# Altium PCB PCB_国产飞控-led端子-copy-copy_2026-03-31.pcbdoc (part 2 of 3)
Units mil, origin at the board's own origin, x right, y up, seen from the top; angles counter-clockwise.
Board outline 3997.5 x 3500.13 mil, 2 copper layers (Top Layer, Bottom Layer); 108 components, 113 nets, 523 pads, 148 vias.
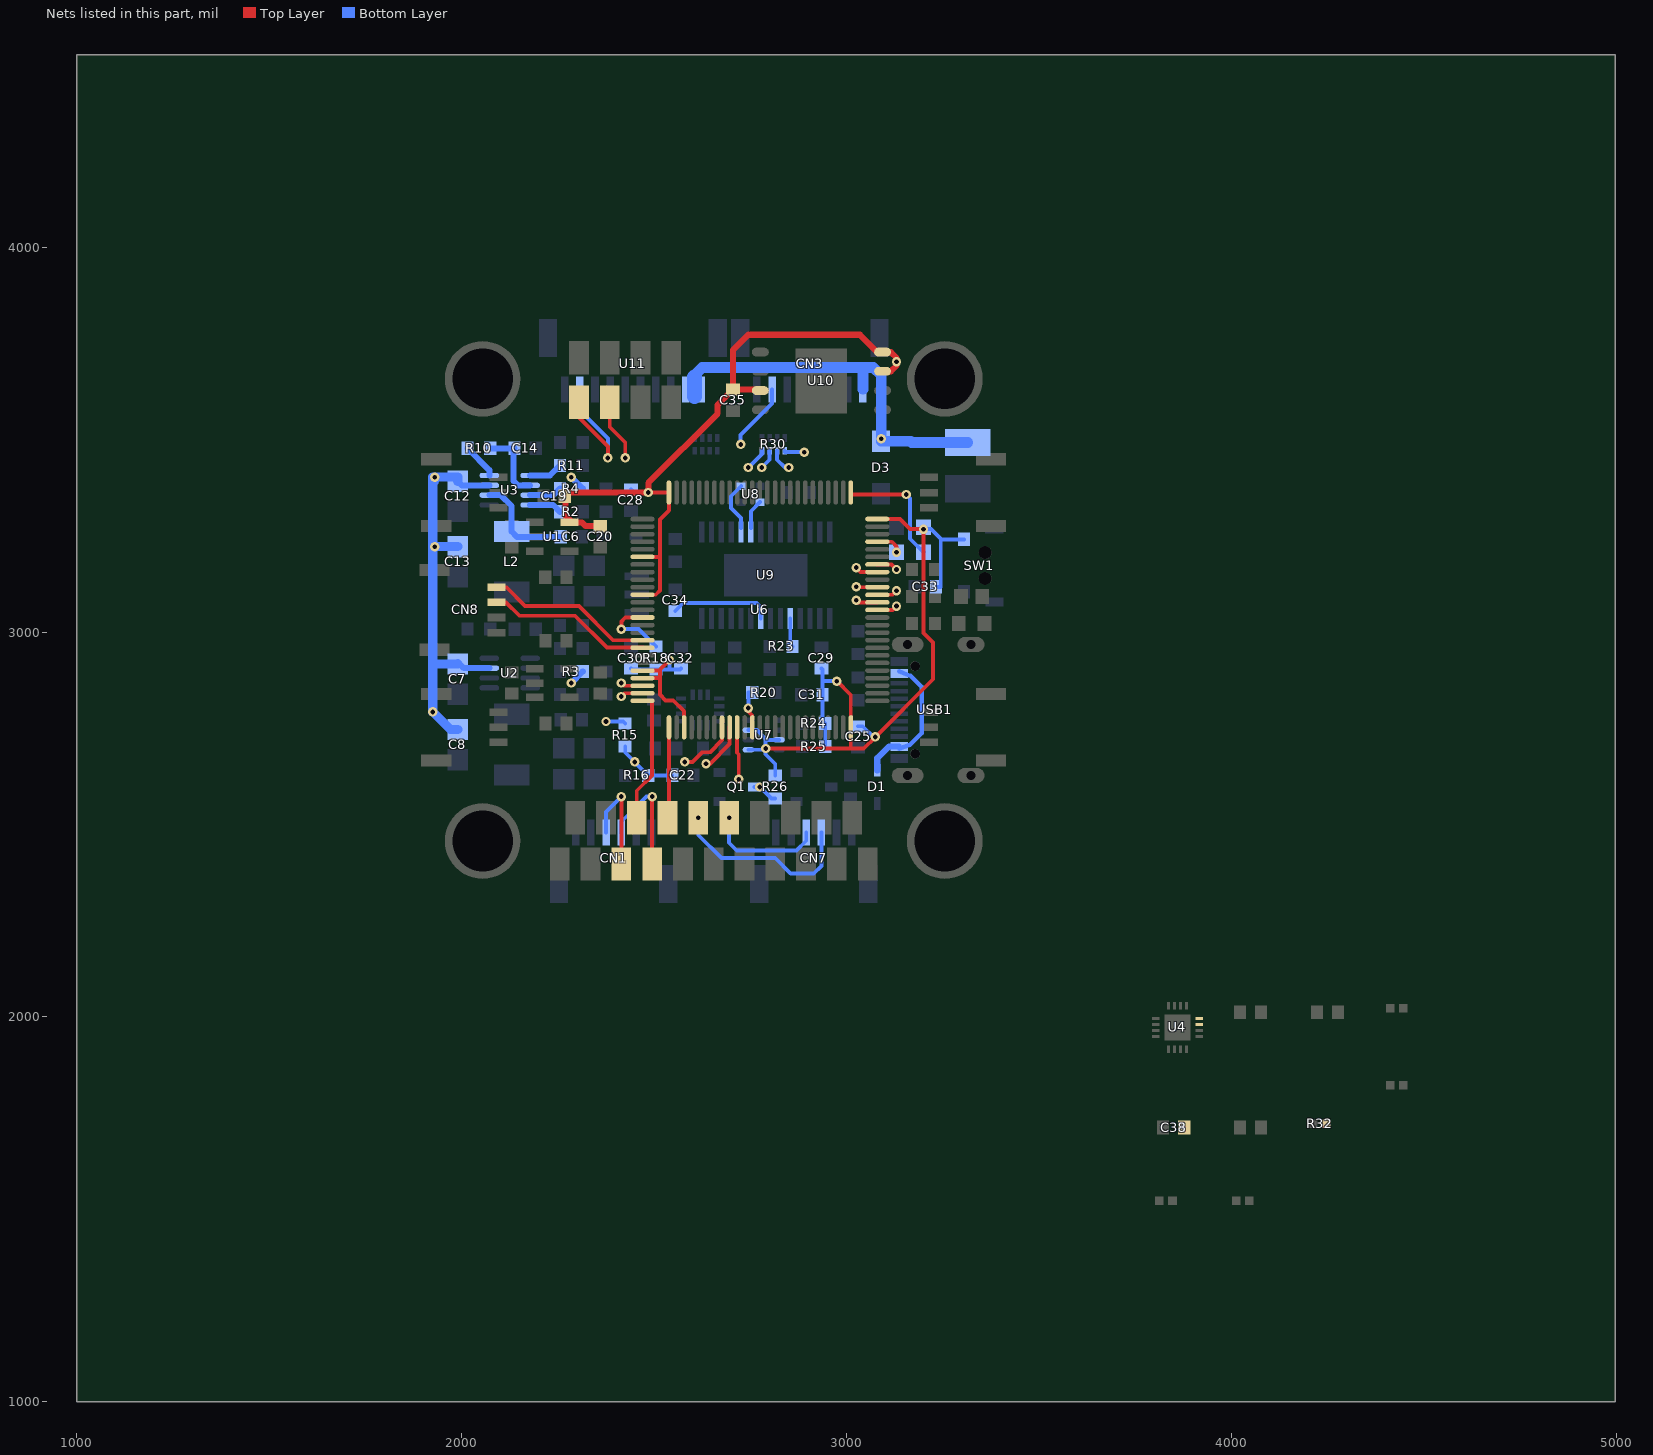
[diagram p2: the nets of this part, all layers, seen from the top]

## Via types
v1: diameter 24.41, hole 12.2, Top Layer to Bottom Layer, tented both sides, 148 vias

## Nets (pads, with @x,y where several pads share a name; then routed paths per layer and width w, separated by ;. In a path a pad name is that pad's centre, name@x,y a point inside that pad or via, vN(x,y) a via of type N, cw(c..) or ccw(c..) an arc to the next point about the centre after c; other vN are vias at no path point) (continued)
SERVO1: R30.4 U6.63 | length 645.2
  Top Layer w10: U6.63@3080.11,3057.63 3120,3057.63 v1(3130,3067.63)
  Mid-Layer 2 w10: v1(2890,3467.63) 2955,3467.63 3090,3332.63 3090,3107.63 v1(3130,3067.63)
  Bottom Layer w10: R30.4@2839.53,3470.8 2839.5,3467.63 v1(2890,3467.63)
SERVO2: R30.3 U6.64 | length 633.9
  Top Layer w10: v1(3025,3082.63) 3030.3,3077.33 U6.64@3080.11,3077.31
  Mid-Layer 2 w10: v1(2850,3427.63) 2960,3427.63 3065,3322.63 3065,3122.63 v1(3025,3082.63)
  Bottom Layer w10: R30.3@2819.84,3470.8 2819.8,3447.83 2840,3427.63 v1(2850,3427.63)
SERVO3: R30.2 U6.65 | length 705.8
  Top Layer w10: U6.65@3080.11,3097 3119.4,3097.03 v1(3130,3107.63)
  Mid-Layer 1 w10: v1(2780,3427.63) 2755,3402.63 2755,3287.63 2900,3142.63 3095,3142.63 v1(3130,3107.63)
  Bottom Layer w10: v1(2780,3427.63) 2800.2,3447.83 R30.2@2800.16,3470.8
SERVO4: R30.1 U6.66 | length 630.9
  Top Layer w10: v1(3025,3117.63) 3025.9,3116.73 U6.66@3080.11,3116.69
  Mid-Layer 1 w10: v1(2745,3427.63) 2730,3412.63 2730,3277.63 2890,3117.63 v1(3025,3117.63)
  Bottom Layer w10: v1(2745,3427.63) 2780.5,3463.13 R30.1@2780.47,3470.8
SWDCLK: pad.5@3200,3207.63 U6.76 | length 317.5
  Top Layer w10: U6.76@3011.22,3362.74 3011.2,3357.63 v1(3155,3357.63)
  Bottom Layer w10: v1(3155,3357.63) 3165,3347.63 3165,3242.63 pad.5@3200,3207.63
SWDIO: pad.5@3130,3207.63 U6.72 | length 70
  Top Layer w10: U6.72@3080.11,3234.8 3117.8,3234.83 3130,3222.63 v1(3130,3207.63)
U3_1: R11.1 U3.1 | length 87.8
  Bottom Layer w15.75: U3.1@2178.1,3407.03 2229.7,3407.03 R11.1@2255.34,3432.63
U3_2: C14.2 R10.1 U3.2 | length 196.4
  Bottom Layer w15.75: R10.1@2074.66,3477.63 C14.2@2137.45,3477.63 2135,3475.23 2135,3392.63 2146.2,3381.43 U3.2@2178.1,3381.43
U3_3: R4.1 U3.3 | length 84.2
  Bottom Layer w15.75: U3.3@2178.1,3355.83 2238.5,3355.83 R4.1@2255.34,3372.63
U3_4: R2.1 U3.4 | length 84.5
  Bottom Layer w15.75: U3.4@2178.1,3330.23 2237.7,3330.23 R2.1@2255.34,3312.63
U3_6: C6.2 L2.1 U3.6 | length 269.1
  Bottom Layer w15.75: U3.6@2072,3355.83 2101.8,3355.83 2130,3327.63 2130,3261.33 2143.7,3247.63 C6.2@2257.45,3247.63
U3_8: R10.2 U3.8 | length 94
  Bottom Layer w15.75: R10.2@2015.35,3477.63 2071.9,3421.03 U3.8@2071.9,3407.03
U4_10: C38.2 U4.10
U4_11: R32.2 U4.11
U6_14: R18.1 U6.14 | length 187.9
  Top Layer w10: v1(2415,3007.63) 2415,3027.63 2425.3,3037.93 U6.14@2469.89,3037.94
  Bottom Layer w10: v1(2415,3007.63) 2459.7,3007.63 R18.1@2505,2962.28
U6_37: R20.2 U6.37 | length 104.7
  Top Layer w10: v1(2745,2802.63) 2745,2793.23 2755.3,2782.93 U6.37@2755.32,2752.52
  Bottom Layer w10: v1(2745,2802.63) 2745,2842.63 R20.2@2755.34,2842.63
U9_5: U8.1 U9.5 | length 131.2
  Bottom Layer w10: U9.5@2726,3269.83 2726,3296.63 2700,3322.63 2700,3352.93 U8.1@2726.38,3379.28
U9_6: U8.3 U9.6 | length 78
  Bottom Layer w10: U9.6@2751.6,3269.83 2751.6,3313.93 U8.3@2775.59,3337.95
U9_19: R23.1 U9.19 | length 75.2
  Bottom Layer w10: U9.19@2853.98,3035.42 2854,2968.33 R23.1@2859.66,2962.63
U9_22: C34.1 U9.22 | length 265.2
  Bottom Layer w10: C34.1@2555,3055.03 2575.9,3075.93 2766.7,3075.93 2777.2,3065.43 U9.22@2777.21,3035.42
UART1_RX: CN7.4 pad.5@2695,2517.63 Q1.3 R26.1 U6.69 | length 1483
  Top Layer w10: U6.69@3080.11,3175.74 3116.9,3175.73 v1(3130,3162.63)
  Mid-Layer 2 w10: v1(2695,2517.63) 2750,2572.63 2990,2572.63 3040,2622.63 3040,2977.63 3080,3017.63 3140,3017.63 3165,3042.63 3165,3127.63 v1(3130,3162.63) ; 2775,2572.63 v1(2775,2597.63)
  Bottom Layer w10: v1(2695,2517.63) 2695,2452.63 2715,2432.63 2870,2432.63 2895.3,2457.93 CN7.4@2895.3,2479.53 ; Q1.3@2760.2,2597.63 v1(2775,2597.63) 2804.7,2567.93 R26.1@2815,2567.93
UART1_TX: CN7.3 pad.5@2615,2517.63 U6.68 | length 1500.3
  Top Layer w10: v1(3025,3167.63) 3036.6,3156.03 U6.68@3080.1,3156.03
  Mid-Layer 2 w10: v1(2615,2517.63) 2620,2517.63 2690,2587.63 2730,2587.63 2775,2632.63 2905,2632.63 3015,2742.63 3015,3052.63 2995,3072.63 2995,3137.63 v1(3025,3167.63)
  Bottom Layer w10: v1(2615,2517.63) 2615,2472.63 2675,2412.63 2815,2412.63 2855,2372.63 2915,2372.63 2934.7,2392.33 CN7.3@2934.7,2479.53
UART2_RX: pad.5@2535,2517.63 U6.26 | length 238.7
  Top Layer w10: pad.5@2535,2517.63 2538.8,2517.63 U6.26@2538.78,2752.52
UART2_TX: pad.5@2455,2517.63 U6.25 | length 345.5
  Top Layer w10: pad.5@2455,2517.63 2455,2587.63 2495,2627.63 2495,2821.43 U6.25@2469.89,2821.41
UART3_RX: CN1.3 pad.5@2495,2397.63 U6.34 | length 611.5
  Top Layer w10: pad.5@2495,2397.63 2495,2457.63 v1(2495,2572.63) ; v1(2635,2657.63) 2645,2657.63 2696.3,2708.93 U6.34@2696.26,2752.52
  Mid-Layer 1 w10: v1(2495,2572.63) 2550,2627.63 2605,2627.63 v1(2635,2657.63)
  Bottom Layer w10: CN1.3@2414.7,2479.53 2414.7,2507.33 2480,2572.63 v1(2495,2572.63)
UART3_TX: CN1.4 pad.5@2415,2397.63 U6.33 | length 640.2
  Top Layer w10: pad.5@2415,2397.63 2415,2462.63 v1(2415,2572.63) ; v1(2580,2662.63) 2600,2662.63 2625,2687.63 2645,2687.63 2676.6,2719.23 U6.33@2676.57,2752.52
  Mid-Layer 1 w10: v1(2415,2572.63) 2505,2662.63 v1(2580,2662.63)
  Bottom Layer w10: CN1.4@2375.3,2479.53 2375.3,2532.93 v1(2415,2572.63)
UART4_RX: CN3.2 pad.5@2305,3597.63 U6.24 U11.2 | length 1626.1
  Top Layer w10: pad.5@2305,3597.63 2305,3557.63 2380,3482.63 v1(2380,3452.63) ; v1(2415,2832.63) 2423.5,2841.13 U6.24@2469.89,2841.09
  Mid-Layer 1 w10: v1(2380,3452.63) 2415,3487.63 v1(2725,3487.63)
  Mid-Layer 2 w10: v1(2380,3452.63) 2365,3437.63 2365,2882.63 v1(2415,2832.63)
  Bottom Layer w10: U11.2@2307.21,3630.7 2307.2,3575.43 2380,3502.63 v1(2380,3452.63) ; v1(2725,3487.63) 2725,3512.63 2806.6,3594.23 CN3.2@2806.57,3630.7
UART4_TX: pad.5@2385,3597.63 U6.23 | length 849.9
  Top Layer w10: pad.5@2385,3597.63 2385,3532.63 2425,3492.63 v1(2425,3452.63) ; v1(2415,2867.63) 2421.9,2860.73 U6.23@2469.9,2860.73
  Mid-Layer 1 w10: v1(2415,2867.63) 2365,2917.63 2365,3392.63 v1(2425,3452.63)
UART8_RX: CN8.2 U6.18 | length 428.1
  Top Layer w10: CN8.2@2090.71,3077.32 2115.3,3077.33 2150,3042.63 2295,3042.63 2378,2959.63 U6.18@2470,2959.63
UART8_TX: CN8.1 U6.17 | length 436.3
  Top Layer w10: CN8.1@2090.71,3116.69 2115.9,3116.73 2165,3067.63 2305,3067.63 2393.7,2978.93 U6.17@2469.89,2978.89
VBAT: C7.2 C8.2 C12.2 C13.2 CN3.8 D3.1 pad.5@3315,3492.63 R3.2 R4.2 R15.2 U2.7 U3.7 U11.9 U11.10 | length 5190.9
  Mid-Layer 1 w10: v1(2285,2867.63) 2375,2777.63 v1(2375,2767.63)
  Mid-Layer 1 w27.56: v1(3090,3502.63) 3035,3557.63 2409,3557.63 2284.8,3432.13 v1(2285,3402.63) ; v1(2285,3402.63) v1(1930,3402.63) 1925,3397.63 v1(1925,2792.63) 2210,2792.63 v1(2285,2867.63) v1(2285,3402.63)
  Bottom Layer w10: v1(2375,2767.63) 2419.7,2767.63 R15.2@2425,2762.28
  Bottom Layer w15.75: C7.2@1990,2922.03 2005.6,2906.43 U2.7@2072,2906.43 ; C12.2@1990,3392 2000.6,3381.43 U3.7@2072,3381.43 ; v1(2285,2867.63) R3.2@2314.66,2897.63 ; v1(2285,3402.63) R4.2@2314.66,3372.63
  Bottom Layer w23.62: v1(1930,3222.03) C13.2@1990,3222 ; v1@1930,3392.03 v1(1930,3402.63) ; 1935,2917.03 C7.2@1990,2917 ; C8.2@1990,2747 1970.6,2747.03 v1(1925,2792.63) 1925,3402.63 1990,3402.63 C12.2@1990,3392
  Bottom Layer w27.56: 2605,3630.73 2605,3667.63 2625,3687.63 3045,3687.63 3070,3687.63 3090,3667.63 D3.1@3090,3495.93 3166.7,3495.93 3170,3492.63 pad.5@3315,3492.63 ; CN3.8@3042.8,3630.7 3042.8,3687.63
  Bottom Layer w39.37: 2605,3612.32 2605,3662.94
VBAT_ADC: C22.2 R15.1 R16.2 U6.35 | length 594.9
  Top Layer w10: U6.35@2715.94,2752.52 2715.9,2686.73 2720,2682.63 v1(2720,2617.63)
  Mid-Layer 2 w10: v1(2450,2662.63) 2485,2627.63 2710,2627.63 v1(2720,2617.63)
  Bottom Layer w10: R15.1@2425,2702.93 2425,2687.33 R16.2@2484.66,2627.63 C22.2@2547.45,2627.63 ; v1(2450,2662.63) 2450,2662.33 v1@2454.7,2657.63
VBUS: D1.1 USB1.A4 USB1.A9 USB1.B4 USB1.B9 | length 366
  Bottom Layer w11.81: USB1.A9@3136.59,2697.24 3165,2707.63 3195,2737.63 3195,2857.63 3166.4,2886.23 USB1.A4@3136.59,2898.02
  Bottom Layer w15.75: D1.1@3080,2640.84 3080,2672.63 3110,2702.63 USB1.A9@3136.6,2702.63
VDD: C19.2 C20.2 C25.2 C28.2 C29.2 C30.2 C31.2 C32.2 C33.2 C35.1 pad.5@3200,3272.63 R18.2 R24.2 R25.2 R26.2 SW1.2 U1.5 U6.6 U6.11 U6.21 U6.22 U6.28 U6.50 U6.75 U6.100 U7.2 U7.6 U7.8 U10.3 U10.7 U10.8 | length 5551.9
  Top Layer w10: U6.22@2469.9,2880.43 2515,2880.43 ; U6.21@2469.9,2900.13 2512.5,2900.13 v1(2540,2927.63) ; U6.11@2469.89,3097 2504.4,3097.03 2515,3107.63 2515,3292.63 2538.8,3316.43 U6.100@2538.78,3362.74 2485.1,3362.73 v1(2485,3362.63) ; 2515,2902.63 2515,2880.43 ; U6.28@2578.1,2752.53 2578.1,2794.53 2550,2822.63 2530,2822.63 2515,2837.63 2515,2880.43 ; v1(2790,2697.63) 3045,2697.63 v1(3075,2727.63) 3225,2877.63 3225,2972.63 3200,2997.63 v1(3200,3267.63) 3165,3267.63 3138.8,3293.83 U6.75@3080.11,3293.85 ; v1(2975,2872.63) 3011.2,2836.43 U6.50@3011.22,2752.52 3011.2,2702.63
  Top Layer w10.08: U6.6@2469.89,3195.43 2515,3195.43
  Top Layer w15.75: C19.2@2267.86,3352.63 2267.9,3362.63 v1(2485,3362.63) 2485,3387.63 2665,3567.63 2665,3590.23 C35.1@2705,3630.18 ; C19.2@2270,3352.63 2270,3302.63 2287.6,3285.03 2296.2,3285.03 2312.6,3285.03 2322.4,3275.23 C20.2@2350,3275.23 ; U10.3@2776.23,3627.63 2773.6,3630.23 C35.1@2705,3630.18 ; U10.7@3093.77,3677.63 3115,3677.63 3130,3692.63 v1(3130,3702.63) 3130,3712.63 3115,3727.63 U10.8@3093.77,3727.63 3080,3727.63 3035,3772.63 2745,3772.63 2705,3732.63 C35.1@2705,3630.18
  Mid-Layer 1 w10: v1(2975,2872.63) 3075,2772.63 v1(3075,2727.63)
  Mid-Layer 1 w15.75: v1(2485,3362.63) 2485,2982.63 v1(2540,2927.63)
  Mid-Layer 2 w10: v1(3130,3702.63) 3130,3522.63 3200,3452.63 v1(3200,3267.63)
  Bottom Layer w10: C30.2@2440,2905.03 2442.1,2902.93 2505,2902.93 2567.9,2902.93 C32.2@2570,2905.03 ; C28.2@2440,3370.18 2447.6,3362.63 v1(2485,3362.63) ; 2540,2902.97 v1(2540,2927.63) ; U7.8@2745.29,2694.24 2786.6,2694.23 v1(2790,2697.63) ; U7.6@2745.29,2745.43 2767.2,2745.43 2790,2722.63 v1(2790,2697.63) ; 2790,2719.83 U7.2@2824.7,2719.84 ; R26.2@2815,2627.28 2815,2657.63 2790,2682.63 v1(2790,2697.63) ; C29.2@2935,2905.03 2937.6,2902.53 C31.2@2937.55,2837.63 2937.6,2769.73 R24.2@2944.66,2762.63 R25.2@2944.66,2702.63 ; 2937.6,2872.73 2937.7,2872.63 v1(2975,2872.63) ; C25.2@3030,2755.18 3042.4,2755.23 3070,2727.63 v1(3075,2727.63) ; pad.5@3200,3272.63 v1(3200,3267.63) ; C33.2@3232.55,3117.63 3245,3117.63 3245,3242.63 3220,3267.63 ; SW1.2@3305.11,3240.81 3246.8,3240.83 3220,3267.63 ; v1(3200,3267.63) 3220,3267.63 ; v1(3200,3267.63) 3220,3267.63
pads on no net: CN3.1 SDO1.2 SDO1.3 SDO1.10 SDO1.11 SW1. SW1.3 SW1.4 U1.4 U4.2 U4.3 U4.4 U4.5 U4.14 U4.15 U4.16 U4.17 U4.21 U6.1 U6.2 U6.3 U6.4 U6.5 U6.7 U6.8 U6.9 U6.19 U6.38 U6.39 U6.40 U6.41 U6.42 U6.43 U6.44 U6.45 U6.46 U6.49 U6.51 U6.52 U6.53 U6.54 U6.55 U6.56 U6.57 U6.58 U6.59 U6.67 U6.73 U6.81 U6.83 U6.88 U6.89 U6.90 U6.91 U6.97 U6.98 U9.1 U9.2 U9.7 U9.12 U9.13 U9.14 U9.15 U9.16 U9.17 U9.18 U9.27 U9.28 U9.29 U12.4 USB1. USB1.A5 USB1.A8 USB1.B5 USB1.B8

## Polygon pours and split planes (outlines as drawn)
GND on Bottom Layer (solid): 1507.5,3985.13 1507.5,2090.13 1532.5,2065.13 3652.5,2065.13 3652.5,3965.13 3632.5,3985.13 3767.5,3985.13 3782.5,4000.13
GND on Mid-Layer 2 (solid): 1525,3972.63 1525,2062.63 1520,2057.63 3650,2057.63 3650,3937.63 3595,3992.63
GND on Mid-Layer 1 (solid): 1500,3995.13 1500,2100.13 1540,2060.13 3585,2060.13 3645,2120.13 3645,3970.13 3650,3975.13
GND on Top Layer (solid): 1530,3960.13 1530,2060.13 1540,2050.13 3610,2050.13 3630,2070.13 3630,3950.13 3625,3955.13

## Keep-outs
Keep-Out Layer:
  lines w10: 1897.13,2457.24 ccw(c2054.61,2457.24) 2054.61,2299.76 ; 1897.13,3658.02 cw(c2054.61,3658.02) 2054.61,3815.5 ; 3255.39,2299.76 ccw(c3255.39,2457.24) 3412.87,2457.24 ; 3255.39,3815.5 cw(c3255.39,3658.02) 3412.87,3658.02

## Other copper
Top Layer:
  region net BOX_MOSI: 2915.85,3499.56 2934.15,3499.56 2930,3491.01 2920,3491.01
  region net BOX_MOSI: 3008.07,3498.48 3008.07,3516.78 3016.62,3512.63 3016.62,3502.63
  region net AT_CS: 2807.18,3306.87 2794.24,3319.81 2803.21,3322.92 2810.29,3315.84
  region net AT_SCK: 2915.76,3319.81 2902.82,3306.87 2899.71,3315.84 2906.79,3322.92
  region net AT_MISO: 2878.16,3319.69 2868.26,3304.29 2863.25,3312.3 2868.79,3320.92
  region net AT_MOSI: 2823.12,3317.71 2840.86,3313.2 2839.1,3322.46 2829.1,3325.01
  region net BOOT0: 3266.93,3153.48 3266.93,3171.78 3258.38,3167.63 3258.38,3157.63
  region net BOOT0: 3265.85,3170.7 3284.15,3170.7 3280.04,3179.25 3269.96,3179.25
  region net MOTOR4: 2595.85,3419.56 2614.15,3419.56 2610,3412.63 2600,3412.63
  region net MOTOR3: 2647.66,3418.13 2629.62,3421.22 2632.2,3412.11 2642.2,3410.4
  region net MOTOR2: 2684.89,3420.48 2666.67,3418.71 2671.6,3410.61 2681.6,3411.57
  region net MOTOR1: 2700.85,3419.56 2719.15,3419.56 2715,3415.13 2705,3415.13
  region net GYRO_MOSI: 2690.85,2859.56 2709.15,2859.56 2705,2851.01 2695,2851.01
  region net GYRO_SCK: 2625.26,2866.03 2607.16,2863.27 2612.5,2855.44 2622.5,2856.96
  region net GYRO_CS1: 2566.66,2840.89 2582.06,2850.78 2583.29,2841.42 2574.68,2835.88
  region net GYRO_MISO: 2670.76,2840.45 2657.82,2853.39 2654.71,2844.42 2661.79,2837.34
  region net GYRO_EXTI2: 2987.18,2931.87 2974.24,2944.81 2983.21,2947.92 2990.29,2940.84
  region net GYRO_EXTI1: 2999.84,3314.84 2981.61,3316.5 2986.5,3324.63 2996.5,3323.73
  region net D-: 2973.07,3158.48 2973.07,3176.78 2981.62,3172.63 2981.62,3162.63
  region net D+: 2999.36,3225.47 2996.6,3207.37 3005.67,3210.13 3007.19,3220.13
  region net BB: 2965.85,2589.56 2984.15,2589.56 2980,2581.01 2970,2581.01
  region net SBUS: 2645.85,2589.56 2664.15,2589.56 2660,2581.01 2650,2581.01
  region net +10V: 2235.85,2549.56 2254.15,2549.56 2252.87,2541.01 2237.13,2541.01
  region net UART3_TX: 2405.85,2564.56 2424.15,2564.56 2420,2556.01 2410,2556.01
  region net UART3_RX: 2485.85,2564.56 2504.15,2564.56 2500,2556.01 2490,2556.01
  region net I2C_SCL: 2835.85,2810.7 2854.15,2810.7 2850,2819.25 2840,2819.25
  region net I2C_SDA: 2775.85,2810.7 2794.15,2810.7 2790,2819.25 2780,2819.25
  region net I2C_SDA: 2841.93,2588.48 2841.93,2606.78 2835,2602.63 2835,2592.63
  region net I2C_SCL: 2905.76,2585.45 2892.82,2598.39 2889.71,2589.42 2896.79,2582.34
  region net BEEPER: 2980.02,2800.66 2961.83,2798.56 2966.9,2790.55 2976.9,2791.7
  region net UART3_RX: 2645.7,2651.75 2639.49,2668.98 2648.76,2668.46 2652.51,2658.06
  region net UART3_TX: 2588.07,2653.48 2588.07,2671.78 2596.62,2667.63 2596.62,2657.63
  region net U6_37: 2739.43,2791.77 2756.47,2798.46 2756.15,2789.15 2745.99,2785.17
  region net HEXT_OUT: 2412.18,3046.87 2399.24,3059.81 2406.46,3061.17 2413.54,3054.09
  region net HEXT_IN: 2385.85,3124.56 2404.15,3124.56 2400,3116.01 2390,3116.01
  region net U6_14: 2405.85,3015.7 2424.15,3015.7 2420,3024.25 2410,3024.25
  region net OSD_OUT_VTX: 2335.76,2560.45 2322.82,2573.39 2319.71,2564.42 2326.79,2557.34
  region net OSD_IN_CAM: 2460.85,3460.7 2479.15,3460.7 2475,3469.25 2465,3469.25
  region net UART4_TX: 2426.14,2872.61 2418.54,2855.95 2427.83,2855.73 2432.4,2865.73
  region net UART4_RX: 2426.62,2828.89 2417.25,2844.63 2426.3,2846.13 2432.25,2836.13
  region net UART4_TX: 2415.85,3460.7 2434.15,3460.7 2430,3469.25 2420,3469.25
  region net UART4_RX: 2370.85,3460.7 2389.15,3460.7 2385,3469.25 2375,3469.25
  region net 3V3-IMU: 2461.93,2758.48 2461.93,2776.78 2453.38,2773.54 2453.38,2761.72
  region net SERVO4: 3033.56,3126.33 3032.56,3108.05 3041.32,3111.73 3041.86,3121.73
  region net SERVO3: 3130.76,3095.45 3117.82,3108.39 3115.86,3100.56 3122.93,3093.49
  region net SERVO2: 3035.57,3088.73 3029.73,3071.38 3039.07,3072.33 3042.43,3082.33
  region net SERVO1: 3130.76,3055.45 3117.82,3068.39 3116.46,3061.17 3123.54,3054.09
  region net UART1_RX: 3130.76,3174.81 3117.82,3161.87 3114.71,3170.84 3121.79,3177.92
  region net UART1_TX: 3037.18,3168.39 3024.24,3155.45 3033.06,3152.5 3040.13,3159.57
  region net VBAT_ADC: 2710.85,2625.7 2729.15,2625.7 2725,2634.25 2715,2634.25
  region net CURRENT1: 2760.76,2679.81 2747.82,2666.87 2744.71,2675.84 2751.79,2682.92
  region net SWDCLK: 3146.93,3348.48 3146.93,3366.78 3138.38,3362.63 3138.38,3352.63
  region net SWDIO: 3120.85,3215.7 3139.15,3215.7 3135,3222.63 3125,3222.63
  region net LED: 2918.07,2793.48 2918.07,2811.78 2926.62,2807.63 2926.62,2797.63
  region net +5V: 2410.76,3175.45 2397.82,3188.39 2392.68,3181.45 2403.82,3170.31
  region net +10V: 2248.07,3673.48 2248.07,3691.78 2256.62,3690.5 2256.62,3674.76
  region net VDD: 3191.93,3258.48 3191.93,3276.78 3183.38,3272.63 3183.38,3262.63
  region net VDD: 3190.85,3259.56 3209.15,3259.56 3205,3251.01 3195,3251.01
  region net VDD: 2475.85,3370.7 2494.15,3370.7 2492.87,3379.25 2477.13,3379.25
  region net VDD: 2476.93,3353.48 2476.93,3371.78 2468.38,3370.5 2468.38,3354.76
  region net VDD: 2493.13,3353.53 2493.02,3371.83 2501.59,3367.73 2501.65,3357.73
  region net VDD: 3087.18,2726.87 3074.24,2739.81 3083.21,2742.92 3090.29,2735.84
  region net VDD: 3075.76,2715.45 3062.82,2728.39 3059.71,2719.42 3066.79,2712.34
  region net VDD: 3135.88,3713.33 3118.65,3707.12 3116.18,3715.31 3132.55,3721.21
  region net VDD: 3135.88,3691.93 3118.65,3698.14 3116.18,3689.95 3132.55,3684.05
  region net LED: 3287,2783.42 3286.86,2801.72 3278.35,2797.51 3278.42,2787.51
  region net LED: 2057.18,3281.87 2044.24,3294.81 2053.21,3297.92 2060.29,3290.84
  region net LED: 2053.18,2703.57 2052.96,2721.88 2061.56,2717.83 2061.67,2707.83
  region net LED: 3285.85,3315.7 3304.15,3315.7 3300,3324.25 3290,3324.25
  region net +5V: 2535.85,3774.56 2554.15,3774.56 2552.87,3766.01 2537.13,3766.01
  region net +5V: 3256.93,2743.48 3256.93,2761.78 3248.38,2757.63 3248.38,2747.63
  region net +5V: 3065.85,2509.56 3084.15,2509.56 3082.87,2501.01 3067.13,2501.01
  region net +5V: 3066.93,2508.48 3066.93,2526.78 3058.38,2525.5 3058.38,2509.76
  region net +5V: 2165.76,2979.81 2152.82,2966.87 2149.7,2975.83 2156.8,2982.93
  region net +5V: 2155.85,2959.56 2174.15,2959.56 2172.87,2951.01 2157.13,2951.01
  region net VDD: 2798.07,2688.48 2798.07,2706.78 2806.62,2702.63 2806.62,2692.63
  region net VDD: 2987.18,2873.39 2974.24,2860.45 2983.21,2857.34 2990.29,2864.42
  region net +5V: 2234.58,3210.99 2221.64,3198.05 2228.58,3192.91 2239.72,3204.05
  region net +5V: 2234.57,3209.36 2221.74,3222.42 2228.73,3227.49 2239.77,3216.26
  region net +5V: 2214.33,3201.08 2214.33,3219.38 2205.78,3218.1 2205.78,3202.36
  region net +5V: 2214.33,3201.08 2214.33,3219.38 2205.78,3218.1 2205.78,3202.36
  region net VDD: 2540.76,2915.45 2527.82,2928.39 2524.71,2919.42 2531.79,2912.34
  region net I2C_SCL: 2845.85,2525.7 2864.15,2525.7 2860,2534.25 2850,2534.25
  region net I2C_SDA: 2765.85,2525.7 2784.15,2525.7 2780,2534.25 2770,2534.25
  region net +10V: 2229.41,2440.94 2264.68,2440.94 2252.87,2464.56 2237.13,2464.56
  region net UART2_RX: 2526.3,2560.94 2551.3,2560.94 2543.8,2575.94 2533.8,2575.94
  region net UART2_TX: 2442.5,2560.94 2467.5,2560.94 2460,2575.94 2450,2575.94
  region net +5V: 2674.68,2354.32 2635.32,2354.32 2647.13,2332.63 2662.87,2332.63
  region net SBUS: 2709.41,2429.55 2731.66,2440.94 2711.99,2447.72 2702.63,2442.93
  region net +5V: 2834.68,2354.32 2795.32,2354.32 2807.13,2332.63 2822.87,2332.63
  region net +5V: 3040.59,2537.32 3040.59,2497.95 3064.21,2509.76 3064.21,2525.5
  region net BB: 2962.5,2440.94 2987.5,2440.94 2980,2455.94 2970,2455.94
  region net I2C_SCL: 2855.81,2560.94 2880.59,2560.94 2890.38,2575.94 2876.24,2575.94
  region net I2C_SDA: 2778.34,2560.94 2800.59,2549.55 2807.37,2562.93 2798.01,2567.72
  region net UART3_TX: 2402.5,2440.94 2427.5,2440.94 2420,2455.94 2410,2455.94
  region net UART3_RX: 2482.5,2440.94 2507.5,2440.94 2500,2455.94 2490,2455.94
  region net +5V: 2355.32,2560.94 2394.68,2560.94 2382.87,2584.56 2367.13,2584.56
  region net +5V: 2394.68,2474.32 2355.32,2474.32 2367.13,2450.7 2382.87,2450.7
  region net OSD_OUT_VTX: 2310.43,2560.94 2320.59,2538.1 2327.93,2558.49 2323.58,2568.28
  region net +10V: 2279.41,3669.32 2279.41,3702.32 2255.79,3690.5 2255.79,3674.76
  region net OSD_IN_CAM: 2410.59,3692.16 2400.43,3669.32 2413.58,3661.98 2417.93,3671.77
  region net +5V: 2564.68,3669.32 2525.32,3669.32 2537.13,3645.7 2552.87,3645.7
  region net +5V: 2525.32,3755.94 2564.68,3755.94 2552.87,3779.56 2537.13,3779.56
  region net +5V: 2525.32,3640.94 2564.68,3640.94 2552.87,3664.56 2537.13,3664.56
  region net UART4_TX: 2397.5,3554.32 2372.5,3554.32 2380,3539.32 2390,3539.32
  region net UART4_RX: 2320.81,3554.32 2295.81,3554.32 2316.24,3539.32 2330.38,3539.32
  region net +5V: 3042.05,2440.94 3080.59,2432.88 3080.57,2437.06 3065.79,2444.56
  region net +5V: 3066.38,2354.32 3029.41,2354.32 3019.43,2338.2 3036.14,2332.63
  region net UART8_TX: 2114.3,3126.53 2114.3,3106.83 2115.94,3111.69 2115.94,3121.69
  region net UART8_RX: 2114.3,3087.13 2114.3,3067.43 2115.31,3072.32 2115.31,3082.32
  region net +5V: 2114.3,3008.43 2114.3,2988.73 2129.36,2993.56 2129.36,3003.6
  region net LED: 3237.91,2801.84 3237.91,2782.16 3252.91,2787.32 3252.91,2797.32
  region net +5V: 3237.91,2762.47 3237.91,2742.79 3252.91,2747.63 3252.91,2757.63
  region net LED: 2095.95,3313.42 2072.09,3320.89 2063.24,3307.94 2074.01,3304.57
  region net +5V: 2119.33,3372.47 2118.68,3352.79 2133.22,3338.54 2133.67,3352.23
  region net LED: 2072.09,2703.42 2072.09,2723.1 2057.09,2717.77 2057.09,2707.77
  region net +5V: 2102.98,2762.47 2119.33,2743.56 2123.28,2758.84 2116.46,2766.17
  region net LED: 3237.91,3411.84 3237.91,3392.16 3245.6,3397.03 3245.6,3407.03
  region net BOOT0: 3245.53,3150.13 3245.53,3175.13 3260.53,3167.63 3260.53,3157.63
  region net 3V3-IMU: 2276.19,2893.22 2299.22,2916.84 2278.17,2924.2 2267.1,2912.99
  region net 3V3-IMU: 2315.56,2916.84 2315.56,2893.22 2339.19,2897.16 2339.19,2912.9
  region net +5V: 2213.2,2818.42 2174.53,2818.42 2206.36,2795.13 2223.07,2800.7
  region net +5V: 2213.2,2842.04 2213.2,2818.42 2217.6,2822.36 2217.6,2838.1
  region net +5V: 2213.2,2916.84 2213.2,2893.22 2222.6,2897.16 2222.6,2912.9
  region net +5V: 2173.83,2893.22 2173.83,2916.84 2152.4,2912.9 2152.4,2897.16
  region net +5V: 2173.83,2916.84 2213.19,2916.84 2201.38,2919.13 2185.63,2919.13
  region net VDD: 2276.5,3273.22 2302.51,3296.84 2277.62,3306.15 2265.95,3295.55
  region net VDD: 2315.87,3296.84 2310.73,3273.22 2316.83,3269.66 2324.39,3284.37
  region net +5V: 2213.5,3222.04 2213.5,3198.42 2222.6,3202.36 2222.6,3218.1
  region net +5V: 2174.13,3198.42 2174.13,3222.04 2152.4,3218.1 2152.4,3202.36
  region net +5V: 2213.5,3222.04 2213.5,3198.42 2222.4,3202.36 2222.4,3218.1
  region net +5V: 2174.13,3296.84 2194.49,3296.84 2174.06,3311.84 2159.92,3311.84
  region net +5V: 2213.5,3296.84 2213.5,3273.22 2217.6,3277.16 2217.6,3292.9
  region net +5V: 2146.73,2910.94 2147.72,2879.44 2152.74,2894.23 2146.83,2910.6
  region net +5V: 2201.69,2750.13 2201.69,2775.13 2186.69,2767.63 2186.69,2757.63
  region net +5V: 2233.19,2744.91 2201.69,2744.91 2207.13,2721.29 2222.87,2721.29
  region net +5V: 2201.69,2780.35 2233.19,2780.35 2225.37,2795.13 2209.63,2795.13
  region net 3V3-IMU: 2288.31,2959.91 2256.81,2959.91 2264.73,2936.29 2280.47,2936.29
  region net 3V3-IMU: 2377.72,2895.09 2352.68,2879.44 2374.62,2872.26 2384.9,2878.68
  region net +5V: 2148.02,3235.82 2146.46,3204.32 2146.83,3204.66 2152.93,3220.84
  region net +5V: 2256.51,3160.35 2288,3160.35 2259.8,3183.97 2237.53,3183.97
  region net +5V: 2288,3160.35 2288,3124.91 2311.62,3134.76 2311.62,3150.5
  region net VDD: 2342.59,3259.44 2342.59,3290.94 2322.4,3283.1 2322.4,3267.36
  region net LED1: 3154.47,3005.73 3154.47,3030.73 3139.47,3023.23 3139.47,3013.23
  region net R27_1: 3245.53,3010.13 3245.53,3035.13 3260.53,3027.63 3260.53,3017.63
  region net LED2: 3182.8,3075.62 3157.8,3075.62 3165.3,3072.93 3175.3,3072.93
  region net R28_1: 3245.53,3080.13 3245.53,3105.13 3260.53,3097.63 3260.53,3087.63
  region net R27_1: 3273.82,3010.13 3273.82,3035.13 3258.82,3027.63 3258.82,3017.63
  region net R28_1: 3273.82,3080.13 3273.82,3105.13 3258.82,3097.63 3258.82,3087.63
  region net VDD: 2283.61,3334.91 2252.12,3334.91 2262.13,3311.29 2277.87,3311.29
  region net VDD: 2719.46,3614.44 2687.28,3637.12 2678.23,3614.6 2691.3,3605.39
  region net VDD: 2687.28,3645.94 2722.72,3645.94 2712.87,3669.56 2697.13,3669.56
  region net VDD: 2722.72,3645.94 2722.72,3614.44 2746.34,3622.36 2746.34,3638.1
  region net VDD: 2544.68,3337.16 2532.87,3337.14 2533.8,3322.14 2543.8,3322.16
  region net VDD: 2532.87,3350.23 2532.87,3375.23 2517.87,3367.73 2517.87,3357.73
  region net MOTOR4: 2623.43,3388.34 2611.61,3388.32 2612.5,3400.12 2622.5,3400.14
  region net MOTOR3: 2643.11,3388.33 2631.29,3388.33 2632.2,3403.33 2642.2,3403.33
  region net BOOT0: 2662.8,3337.15 2650.98,3337.15 2651.86,3322.03 2661.94,3322.03
  region net MOTOR2: 2682.48,3388.32 2670.66,3388.34 2671.6,3403.34 2681.6,3403.32
  region net MOTOR1: 2702.17,3388.31 2690.35,3388.35 2691.3,3401.35 2701.3,3401.32
  region net BOX_CS: 2800.6,3388.33 2788.78,3388.33 2789.7,3402.33 2799.7,3402.33
  region net AT_CS: 2820.28,3337.17 2808.46,3337.13 2809.4,3327.01 2819.4,3327.04
  region net AT_MOSI: 2839.97,3337.16 2828.15,3337.13 2829.1,3322.14 2839.1,3322.16
  region net AT_MISO: 2859.65,3337.12 2847.83,3337.18 2848.7,3328.95 2858.7,3328.91
  region net AT_SCK: 2899.02,3337.14 2887.2,3337.16 2888.1,3329.54 2898.1,3329.52
  region net BOX_MOSI: 2938.39,3388.32 2926.57,3388.34 2927.5,3403.34 2937.5,3403.32
  region net BOX_MISO: 2958.08,3388.32 2946.26,3388.34 2947.2,3403.34 2957.2,3403.32
  region net BOX_SCK: 2977.76,3388.31 2965.95,3388.35 2966.9,3403.35 2976.9,3403.31
  region net GYRO_EXTI1: 2997.45,3337.13 2985.64,3337.17 2986.5,3322.16 2996.5,3322.14
  region net SWDCLK: 3017.13,3370.13 3017.13,3345.13 3032.13,3352.63 3032.13,3362.63
  region net VDD: 3105.71,3299.76 3105.69,3287.95 3120.69,3288.83 3120.71,3298.83
  region net SWDIO: 3105.72,3228.89 3105.69,3240.71 3117.79,3239.83 3117.81,3229.83
  region net D+: 3054.53,3221.02 3054.51,3209.2 3039.51,3210.13 3039.53,3220.13
  region net D-: 3054.52,3189.52 3054.52,3201.34 3039.52,3200.43 3039.52,3190.43
  region net UART1_RX: 3105.71,3181.65 3105.7,3169.83 3116.9,3170.73 3116.9,3180.73
  region net UART1_TX: 3054.53,3150.15 3054.51,3161.97 3039.51,3161.03 3039.53,3151.03
  region net SERVO4: 3054.53,3122.6 3054.5,3110.78 3039.51,3111.73 3039.53,3121.73
  region net SERVO3: 3105.71,3091.09 3105.69,3102.91 3119.39,3102.03 3119.41,3092.03
  region net SERVO2: 3054.53,3083.22 3054.51,3071.4 3039.51,3072.33 3039.53,3082.33
  region net SERVO1: 3105.7,3051.72 3105.7,3063.54 3120,3062.63 3120,3052.63
  region net LED2: 3105.7,3043.85 3105.7,3032.03 3120.7,3032.93 3120.7,3042.93
  region net LED1: 3105.71,3024.17 3105.69,3012.35 3120.69,3013.23 3120.71,3023.23
  region net GYRO_EXTI2: 3054.54,2992.66 3054.5,3004.48 3040.89,3003.53 3040.92,2993.53
  region net VDD: 3017.13,2778.12 3005.32,2778.1 3006.2,2793.1 3016.2,2793.12
  region net VDD: 3017.13,2726.92 3005.32,2726.94 3006.2,2711.94 3016.2,2711.92
  region net BEEPER: 2977.76,2778.09 2965.95,2778.13 2966.9,2793.13 2976.9,2793.09
  region net LED: 2958.08,2778.09 2946.26,2778.13 2947.2,2785.45 2957.2,2785.41
  region net CURRENT1: 2741.54,2726.92 2729.72,2726.94 2730.6,2711.94 2740.6,2711.92
  region net VBAT_ADC: 2721.85,2726.91 2710.03,2726.94 2710.9,2711.94 2720.9,2711.92
  region net UART3_RX: 2702.17,2726.94 2690.35,2726.91 2691.3,2711.92 2701.3,2711.94
  region net UART3_TX: 2682.48,2726.95 2670.66,2726.91 2671.6,2719.21 2681.6,2719.25
  region net GYRO_MOSI: 2662.8,2778.11 2650.98,2778.11 2651.9,2793.11 2661.9,2793.11
  region net GYRO_MISO: 2643.11,2778.11 2631.29,2778.11 2632.2,2793.11 2642.2,2793.11
  region net GYRO_SCK: 2623.43,2778.12 2611.61,2778.1 2612.5,2793.1 2622.5,2793.12
  region net GYRO_CS1: 2603.74,2778.12 2591.92,2778.1 2592.8,2793.1 2602.8,2793.12
  region net VDD: 2584.05,2778.13 2572.24,2778.09 2573.1,2793.09 2583.1,2793.13
  region net UART2_RX: 2544.68,2726.94 2532.87,2726.92 2533.8,2711.92 2543.8,2711.94
  region net UART2_TX: 2500.86,2823.85 2482.5,2815.5 2490,2800.5 2500,2800.5
  region net UART4_RX: 2444.32,2846.99 2444.28,2835.18 2429.29,2836.13 2429.31,2846.13
  region net UART4_TX: 2444.32,2854.87 2444.28,2866.68 2429.28,2865.73 2429.32,2855.73
  region net VDD: 2495.49,2886.37 2495.47,2874.55 2510.47,2875.43 2510.49,2885.43
  region net VDD: 2495.49,2906.05 2495.47,2894.24 2510.47,2895.13 2510.49,2905.13
  region net UART8_RX: 2444.47,2965.1 2444.13,2953.3 2429.16,2954.63 2429.45,2964.63
  region net UART8_TX: 2444.31,2984.8 2444.28,2972.98 2429.29,2973.93 2429.31,2983.93
  region net I2C_SDA: 2495.5,3004.48 2495.47,2992.66 2510.47,2993.53 2510.49,3003.53
  region net I2C_SCL: 2495.49,3024.17 2495.47,3012.35 2510.47,3013.23 2510.49,3023.23
  region net U6_14: 2444.3,3032.03 2444.3,3043.85 2429.3,3042.93 2429.3,3032.93
  region net HEXT_OUT: 2444.3,3051.72 2444.3,3063.54 2429.3,3062.63 2429.3,3052.63
  region net HEXT_IN: 2444.31,3083.22 2444.29,3071.4 2429.29,3072.33 2429.31,3082.33
  region net VDD: 2495.5,3091.09 2495.46,3102.91 2504.38,3102.03 2504.42,3092.03
  region net VDD: 2495.48,3189.52 2495.48,3201.34 2510.6,3200.47 2510.6,3190.39
  region net BOX_CS: 2770.07,3716.18 2761.63,3738.31 2748.81,3718.51 2755.17,3710.73
  region net BOX_MISO: 2786.76,3666.18 2786.75,3689.06 2801.75,3682.63 2801.76,3672.63
  region net VDD: 2766.97,3638.99 2764.44,3616.25 2741.36,3622.36 2743.11,3638.1
  region net VDD: 3076.97,3718.06 3090.77,3739.06 3068.98,3749.79 3058.89,3737.61
  region net VDD: 3109.36,3737.87 3099.23,3717.37 3121.79,3709.71 3129.15,3724.61
  region net VDD: 3109.36,3667.37 3099.22,3687.87 3121.78,3695.54 3129.15,3680.64
  region net BOX_SCK: 3083.26,3639.06 3083.24,3616.18 3068.25,3622.63 3068.25,3632.63
  region net BOX_MOSI: 3104.29,3566.18 3083.25,3566.18 3088.8,3556.43 3098.8,3556.43
Mid-Layer 1:
  region net SERVO4: 2745.76,3415.45 2732.82,3428.39 2729.71,3419.42 2736.79,3412.34
  region net SERVO3: 2780.76,3415.45 2767.82,3428.39 2764.71,3419.42 2771.79,3412.34
  region net GYRO_EXTI2: 2552.18,2871.87 2539.24,2884.81 2548.21,2887.92 2555.29,2880.84
  region net GYRO_EXTI2: 2966.93,2923.48 2966.93,2941.78 2958.38,2937.63 2958.38,2927.63
  region net UART3_TX: 2427.18,2571.87 2414.24,2584.81 2423.21,2587.92 2430.29,2580.84
  region net UART3_RX: 2507.18,2571.87 2494.24,2584.81 2503.21,2587.92 2510.29,2580.84
  region net I2C_SCL: 2857.18,2803.39 2844.24,2790.45 2853.21,2787.34 2860.29,2794.42
  region net I2C_SDA: 2797.18,2803.39 2784.24,2790.45 2793.21,2787.34 2800.29,2794.42
  region net I2C_SDA: 2850.76,2609.81 2837.82,2596.87 2834.71,2605.84 2841.79,2612.92
  region net I2C_SCL: 2895.85,2605.7 2914.15,2605.7 2910,2614.25 2900,2614.25
  region net BEEPER: 2963.7,2797.18 2981.16,2802.69 2980,2793.36 2970,2790.21
  region net UART3_RX: 2635.76,2645.45 2622.82,2658.39 2619.71,2649.42 2626.79,2642.34
  region net UART3_TX: 2571.93,2653.48 2571.93,2671.78 2563.38,2667.63 2563.38,2657.63
  region net VBAT: 2297.18,2868.39 2284.24,2855.45 2293.21,2852.34 2300.29,2859.42
  region net VBAT: 2380.88,2778.33 2363.65,2772.12 2364.17,2781.39 2374.57,2785.14
  region net +5V: 2765.76,2964.81 2752.82,2951.87 2749.71,2960.84 2756.79,2967.92
  region net OSD_OUT_VTX: 2325.85,2580.7 2344.15,2580.7 2340,2589.25 2330,2589.25
  region net OSD_OUT_VTX: 2850.76,2855.45 2837.82,2868.39 2834.71,2859.42 2841.79,2852.34
  region net OSD_IN_CAM: 2482.18,3453.39 2469.24,3440.45 2478.21,3437.34 2485.29,3444.42
  region net UART4_TX: 2415.76,2879.81 2402.82,2866.87 2399.71,2875.84 2406.79,2882.92
  region net UART4_TX: 2425.76,3440.45 2412.82,3453.39 2409.71,3444.42 2416.79,3437.34
  region net UART4_RX: 2392.18,3451.87 2379.24,3464.81 2388.21,3467.92 2395.29,3460.84
  region net SERVO4: 3016.93,3108.48 3016.93,3126.78 3008.38,3122.63 3008.38,3112.63
  region net SERVO3: 3130.76,3119.81 3117.82,3106.87 3114.71,3115.84 3121.79,3122.92
  region net LED: 2922.18,2803.39 2909.24,2790.45 2918.21,2787.34 2925.29,2794.42
  region net UART4_RX: 2716.93,3478.48 2716.93,3496.78 2708.38,3492.63 2708.38,3482.63
  region net OSD_IN_CAM: 2555.76,3159.81 2542.82,3146.87 2539.71,3155.84 2546.79,3162.92
  region net VDD: 2475.85,3354.56 2494.15,3354.56 2492.87,3346.01 2477.13,3346.01
  region net VDD: 3065.85,2735.7 3084.15,2735.7 3080,2744.25 3070,2744.25
  region net LED: 2885.85,2410.7 2904.15,2410.7 2900,2419.25 2890,2419.25
  region net LED: 2885.85,2410.7 2904.15,2410.7 2900,2419.25 2890,2419.25
  region net LED: 3285.85,2800.7 3304.15,2800.7 3300,2809.25 3290,2809.25
  region net LED: 3285.85,2784.56 3304.15,2784.56 3300,2776.01 3290,2776.01
  region net LED: 2035.85,2704.56 2054.15,2704.56 2050,2696.01 2040,2696.01
  region net LED: 3307.18,3308.39 3294.24,3295.45 3303.21,3292.34 3310.29,3299.42
  region net +5V: 2612.18,3213.39 2599.24,3200.45 2608.21,3197.34 2615.29,3204.42
  region net +5V: 3225.85,3354.56 3244.15,3354.56 3242.87,3346.01 3227.13,3346.01
  region net +5V: 3225.85,3354.56 3244.15,3354.56 3240,3346.01 3230,3346.01
  region net +5V: 3265.76,2764.81 3252.82,2751.87 3247.68,2758.81 3258.82,2769.95
  region net VDD: 2987.18,2873.39 2974.24,2860.45 2983.21,2857.34 2990.29,2864.42
  region net +5V: 3033.24,3251.93 3020.3,3264.88 3029.28,3267.98 3036.35,3260.91
  region net VDD: 2540.76,2939.81 2527.82,2926.87 2522.68,2933.81 2533.82,2944.95
  region net BEEPER: 2965.85,2655.7 2984.15,2655.7 2980,2664.25 2970,2664.25